# EAGLE board fixie18 (EAGLE 7.2.0)
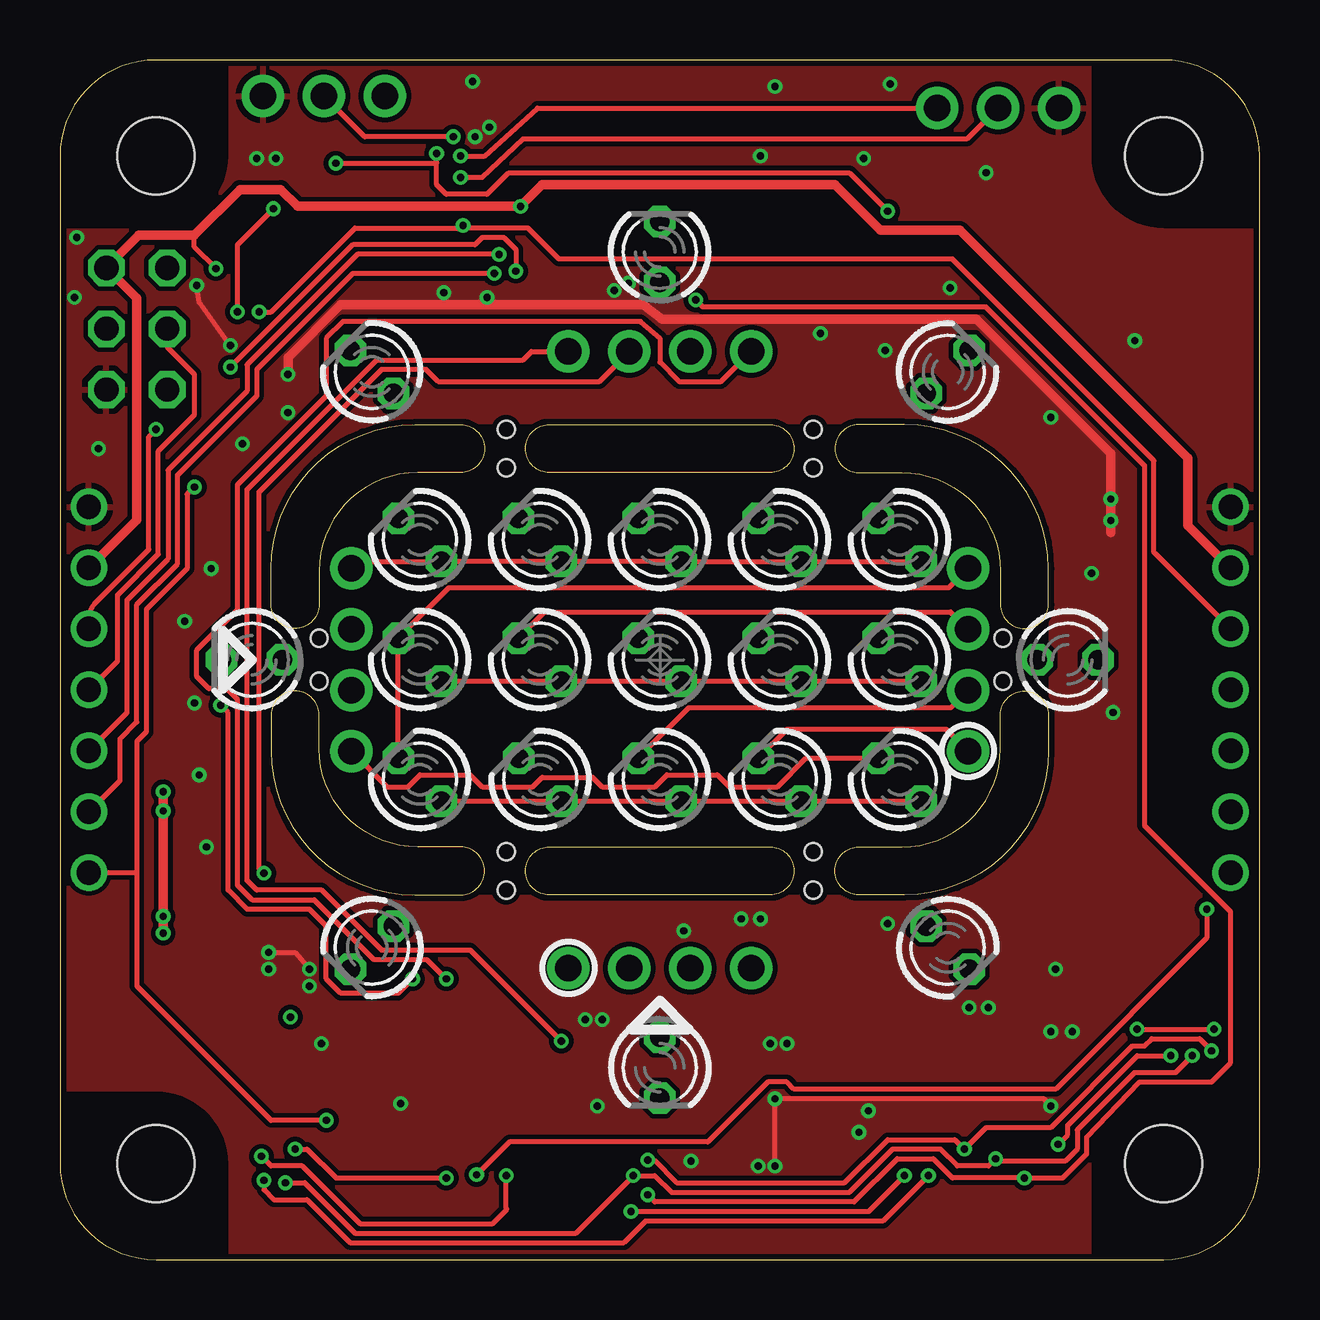
[diagram p0: board, top side]
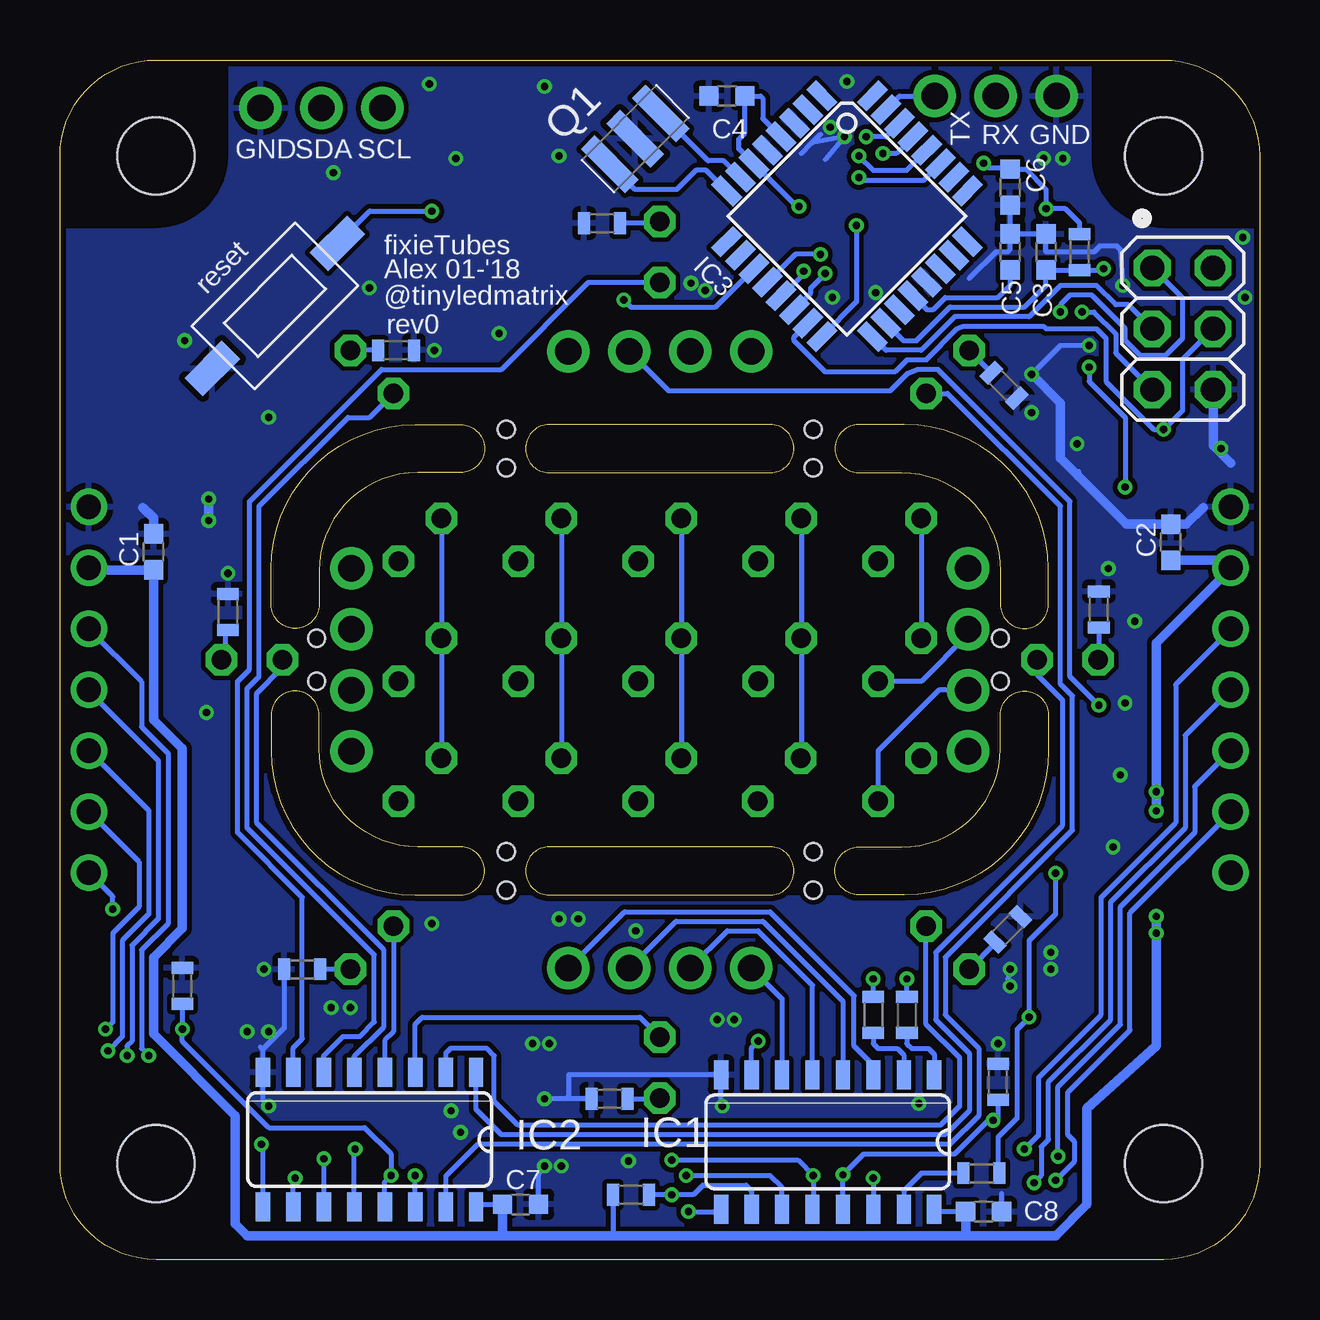
[diagram p1: board, bottom side, seen from below]

Size 50 x 50 mm. Coordinates in mm from the lower left corner, seen from the top.
Outline: 17.7,33.8 arc-90 16.7,32.8 14.9,32.8 arc90 10.8,28.7 10.8,27.3 arc-90 9.8,26.3 arc-90 8.8,27.3 8.8,28.8 arc-90 14.8,34.8 16.7,34.8 arc-90 17.7,33.8
Outline: 17.7,16.2 arc90 16.7,17.2 14.9,17.2 arc-90 10.8,21.3 10.8,22.7 arc90 9.8,23.7 arc90 8.8,22.7 8.8,21.2 arc90 14.8,15.2 16.7,15.2 arc90 17.7,16.2
Outline: 32.3,33.8 arc90 33.3,32.8 35.1,32.8 arc-90 39.2,28.7 39.2,27.3 arc90 40.2,26.3 arc90 41.2,27.3 41.2,28.8 arc90 35.2,34.8 33.3,34.8 arc90 32.3,33.8
Outline: 32.3,16.2 arc-90 33.3,17.2 35.1,17.2 arc90 39.2,21.3 39.2,22.7 arc-90 40.2,23.7 arc-90 41.2,22.7 41.2,21.2 arc-90 35.2,15.2 33.3,15.2 arc-90 32.3,16.2
Outline: 19.4,16.2 arc-90 20.4,17.2 29.6,17.2 arc-90 30.6,16.2 arc-90 29.6,15.2 20.4,15.2 arc-90 19.4,16.2
Outline: 20.4,34.8 29.6,34.8 arc-90 30.6,33.8 arc-90 29.6,32.8 20.4,32.8 arc-90 19.4,33.8 arc-90 20.4,34.8
Copper layers (1*16): Top 0.035mm / dielectric 1.5mm / Bottom 0.035mm
Design rules "dirt_cheap_dirty_boards.v1 *": minimum track width 5mil, minimum drill 12mil, track to track 0.2mm, track to pad 0.2mm, pad to pad 0.2mm, via to via 0.2mm, smd to smd 0.2mm, copper to edge 10mil, drill to drill 10mil, minimum pad ring 10mil, minimum via ring 6mil, stop-mask expansion 2mil, vias tented up to drill 25mil, thermal gap 10mil
Holes 0.7 mm at 18.6,15.4 18.6,17 31.4,15.4 31.4,17 31.4,33 31.4,34.6 18.6,33 18.6,34.6 10.8,25.9 10.8,24.1 39.3,24.1 39.3,25.9
tRestrict: 5 lines
bRestrict: 7 lines

## Footprints (pad centres in the part's own frame; a part is rotated, then mirrored left to right if it is on the bottom)
C0603-VISHAY = smd 0.8 x 0.8: 1 -0.75,0; 2 0.75,0
SO16 = smd 0.6 x 1.2: 1 -4.445,-2.8; 2 -3.175,-2.8; 3 -1.905,-2.8; 4 -0.635,-2.8; 5 0.635,-2.8; 6 1.905,-2.8; 7 3.175,-2.8; 8 4.445,-2.8; 9 4.445,2.8; 10 3.175,2.8; 11 1.905,2.8; 12 0.635,2.8; 13 -0.635,2.8; 14 -1.905,2.8; 15 -3.175,2.8; 16 -4.445,2.8
TQFP32-08 = smd 1.27 x 0.559: 1 -4.293,2.8; 2 -4.293,2; 3 -4.293,1.2; 4 -4.293,0.4; 5 -4.293,-0.4; 6 -4.293,-1.2; 7 -4.293,-2; 8 -4.293,-2.8; 17 4.293,-2.8; 18 4.293,-2; 19 4.293,-1.2; 20 4.293,-0.4; 21 4.293,0.4; 22 4.293,1.2; 23 4.293,2; 24 4.293,2.8 | smd 0.559 x 1.27: 9 -2.8,-4.293; 10 -2,-4.293; 11 -1.2,-4.293; 12 -0.4,-4.293; 13 0.4,-4.293; 14 1.2,-4.293; 15 2,-4.293; 16 2.8,-4.293; 25 2.8,4.293; 26 2,4.293; 27 1.2,4.293; 28 0.4,4.293; 29 -0.4,4.293; 30 -1.2,4.293; 31 -2,4.293; 32 -2.8,4.293
1X07_RNDNOSILK = drill 1.016: 1 -7.62,0; 2 -5.08,0; 3 -2.54,0; 4 0,0; 5 2.54,0; 6 5.08,0; 7 7.62,0
1X04_ROUND_NOSM = drill 1.1 pad 1.778: 1 -3.81,0; 2 -1.27,0; 3 1.27,0; 4 3.81,0
2X03 = drill 1.016 octagon: 1 -2.54,-1.27; 2 -2.54,1.27; 3 0,-1.27; 4 0,1.27; 5 2.54,-1.27; 6 2.54,1.27
1X03_ROUND_NOSM = drill 1.1 pad 1.778: 1 -2.54,0; 2 0,0; 3 2.54,0
LED3MM = drill 0.813 octagon: A -1.27,0; K 1.27,0
CSTCR6M = smd 0.8 x 2.6: 1 -1.5,0; 2 0,0; 3 1.5,0
ADAFRUIT_R0603-VISHAY = smd 0.5 x 0.9: 1 -0.75,0; 2 0.75,0
SMDSWITCH = smd 2.184 x 1.067: P$1 -3.685,0; P$2 3.685,0
DP5050_V1 = hole 3.2: 4,4; 46,4; 46,46; 4,46

## Placement (x,y rotation side)
C1  1u  [C0603-VISHAY]  46.1,29.5 90 bottom
C2  1u  [C0603-VISHAY]  3.7,29.9 90 bottom
C3  0.1  [C0603-VISHAY]  8.9,42 270 bottom
C4  0.1  [C0603-VISHAY]  22.2,48.5 0 bottom
C5  0.1  [C0603-VISHAY]  10.4,42 270 bottom
C6  0.1  [C0603-VISHAY]  10.4,44.7 90 bottom
C7  100n  [C0603-VISHAY]  30.8,2.3 0 bottom
C8  100n  [C0603-VISHAY]  11.5,2 0 bottom
IC1  74LS595D  [SO16]  18,4.9 180 bottom
IC2  74LS595D  [SO16]  37.1,5 180 bottom
IC3  MEGA8-AI  [TQFP32-08]  17.19,43.49 315 bottom
JP1  [1X07_RNDNOSILK]  48.8,23.75 90 top
JP2  [1X07_RNDNOSILK]  1.2,23.75 90 top
JP3  [1X04_ROUND_NOSM]  25,12.15 0 top
JP4  [1X04_ROUND_NOSM]  25,37.85 180 top
JP5  [2X03]  3.2,38.8 270 bottom
JP6  [1X03_ROUND_NOSM]  39.1,48 180 top
JP7  [1X03_ROUND_NOSM]  11,48.5 0 top
JP8  [1X04_ROUND_NOSM]  37.85,25 90 top
JP9  [1X04_ROUND_NOSM]  12.15,25 270 top
LED1  [LED3MM]  25,42 90 top
LED2  [LED3MM]  37,37 45 top
LED3  [LED3MM]  42,25 0 top
LED4  [LED3MM]  37,13 315 top
LED5  [LED3MM]  25,8 270 top
LED6  [LED3MM]  13,13 225 top
LED7  [LED3MM]  8,25 180 top
LED8  [LED3MM]  13,37 135 top
LED9  [LED3MM]  15,20 135 top
LED10  [LED3MM]  20.02,20 135 top
LED11  [LED3MM]  25,20 135 top
LED12  [LED3MM]  30,20 135 top
LED13  [LED3MM]  35,20 135 top
LED14  [LED3MM]  15,25 135 top
LED15  [LED3MM]  20,25 135 top
LED16  [LED3MM]  25,25 135 top
LED17  [LED3MM]  30,25 135 top
LED18  [LED3MM]  35,25 135 top
LED19  [LED3MM]  15,30 135 top
LED20  [LED3MM]  20,30 135 top
LED21  [LED3MM]  25,30 135 top
LED22  [LED3MM]  30,30 135 top
LED23  [LED3MM]  35,30 135 top
Q1  CSTCR6M00G53Z  [CSTCR6M]  26.02,46.72 225 bottom
R1  1k  [ADAFRUIT_R0603-VISHAY]  44.9,11.4 270 bottom
R2  1k  [ADAFRUIT_R0603-VISHAY]  10.9,7.4 270 bottom
R3  1k  [ADAFRUIT_R0603-VISHAY]  26.2,2.7 180 bottom
R4  10k  [ADAFRUIT_R0603-VISHAY]  7.5,42 270 bottom
R5  [ADAFRUIT_R0603-VISHAY]  27.4,43.2 0 bottom
R6  [ADAFRUIT_R0603-VISHAY]  11.6,3.6 0 bottom
R7  [ADAFRUIT_R0603-VISHAY]  14.7,10.2 90 bottom
R8  [ADAFRUIT_R0603-VISHAY]  36,37.9 180 bottom
R9  [ADAFRUIT_R0603-VISHAY]  16.1,10.2 90 bottom
R10  [ADAFRUIT_R0603-VISHAY]  43,27 270 bottom
R11  [ADAFRUIT_R0603-VISHAY]  39.9,12.1 0 bottom
R12  [ADAFRUIT_R0603-VISHAY]  27.1,6.7 0 bottom
R13  [ADAFRUIT_R0603-VISHAY]  10.49,13.76 225 bottom
R14  [ADAFRUIT_R0603-VISHAY]  6.7,27.1 270 bottom
R15  [ADAFRUIT_R0603-VISHAY]  10.64,36.44 135 bottom
S1  [SMDSWITCH]  41.04,39.75 45 bottom
U$1  [DP5050_V1]  0,0 0 top

## Library data of the parts
C1-C8 R1-R15 = rcl
IC1 IC2 = SparkFun-DigitalIC; PROD_ID: IC-07875
IC3 = atmel; MPN: ATMEGA8-16AU; OC_FARNELL: 9171371; OC_NEWARK: 73M8863
JP1-JP9 = pinhead
LED1-LED23 = led
Q1 = murata-filter; MPN: CSTCR6M00G53-R0; OC_FARNELL: 1170434; OC_NEWARK: 25M8759
S1 = _miniRoboter
U$1 = dp_pcb

## Nets
1: JP4.3 R6.2
2: JP4.2 R7.2
3: JP4.1 R9.2
!CLR: IC1.10 IC2.10 IC3.11 R3.1
+5V: C1.1 C2.1 C3.2 C4.2 C7.1 C8.1 IC1.16 IC2.16 IC3.4 IC3.6 IC3.18 JP1.6 JP2.6 JP5.2 R3.2 R4.2
A: IC1.3 JP3.4
B: IC1.4 JP3.3
C: IC1.5 JP3.2
CLK: IC1.11 IC2.11 IC3.17 JP1.4 JP2.4 JP5.3
COL_1: JP9.3 LED9.A LED10.A LED11.A LED12.A LED13.A
COL_2: JP9.2 LED14.A LED15.A LED16.A LED17.A LED18.A
COL_3: JP9.1 LED19.A LED20.A LED21.A LED22.A LED23.A
D: IC1.6 JP3.1
E: IC1.7 JP4.4
GND: C1.2 C2.2 C3.1 C4.1 C5.1 C6.1 C7.2 C8.2 IC1.8 IC2.8 IC3.3 IC3.5 IC3.21 JP1.7 JP2.7 JP5.6 JP6.1 JP7.1 Q1.2 R1.1 R2.1 R5.1 R8.1 R10.1 R11.1 R12.1 R13.1 R14.1 R15.1 S1.P$1
LATCH: IC1.12 IC2.12 IC3.12 JP1.3 JP2.3
MATRIX_EN: IC1.13 IC3.13 JP1.1 JP2.1 R2.2
MCU_RST: C6.2 IC3.29 JP5.5 R4.1 S1.P$2
N$2: IC2.7 LED1.A
N$3: IC2.6 LED2.A
N$4: IC2.5 LED3.A
N$5: IC2.4 LED4.A
N$6: IC2.3 LED5.A
N$7: IC2.2 LED6.A
N$8: IC2.1 LED7.A
N$9: IC2.15 LED8.A
N$10: IC1.15 R6.1
N$11: IC1.1 R7.1
N$12: IC1.2 R9.1
N$13: LED1.K R5.2
N$14: LED2.K R8.2
N$15: LED3.K R10.2
N$16: LED4.K R11.2
N$17: LED5.K R12.2
N$18: LED6.K R13.2
N$19: LED7.K R14.2
N$20: LED8.K R15.2
N$21: IC1.9 IC2.14
N$24: IC3.32
N$25: IC3.1
N$26: IC3.2
N$27: IC3.9
N$28: IC3.10
N$30: IC3.23
N$31: IC3.24
N$32: IC3.25
N$33: IC3.26
N$36: C5.2 IC3.20
N$38: IC3.19
N$39: IC3.22
PB6: IC3.7 Q1.1
PB7: IC3.8 Q1.3
RING_EN: IC2.13 IC3.14 JP1.2 JP2.2 R1.2
ROW_A: JP8.4 LED9.K LED14.K LED19.K
ROW_B: JP8.3 LED10.K LED15.K LED20.K
ROW_C: JP8.2 LED11.K LED16.K LED21.K
ROW_D: JP8.1 LED12.K LED17.K LED22.K
ROW_E: JP9.4 LED13.K LED18.K LED23.K
RX: IC3.30 JP7.2
SCL: IC3.28 JP6.3
SDA: IC3.27 JP6.2
SI: IC1.14 IC3.15 JP2.5 JP5.4
SO: IC2.9 IC3.16 JP1.5 JP5.1
TX: IC3.31 JP7.3

## Tracks (layer width: path | path; a pad name or v marks a point on that pad's centre or on a via)
1  (via drill 0.3)
  Top 0.2: v8.5,16.1 8.3,16.3 8.3,32 13.4,37.1 15.26,37.1 15.76,36.6 22.48,36.6 JP4.3
  Bottom 0.2: v8.5,16.1 8.5,14.4 9.6,13.3 v9.6,10.1 10.1,9.6 10.1,5.9 10.9,5.1 10.9,3.65 R6.2
2  (via drill 0.3)
  Top 0.2: v14.7,11.7 14.1,11.1 11.7,11.1 11.1,11.7 11.1,13.9 10.4,14.6 7.8,14.6 7,15.4 7,22.8 v6.7,23.1
  Bottom 0.2: R7.2 v14.7,11.7 | v6.7,23.1 7.9,24.3 7.9,31.6 13.4,37.1 14.25,37.1 14.7,36.9 15.4,36.2 24.62,36.2 JP4.2
3  (via drill 0.3)
  Top 0.2: JP4.1 27.56,36.6 25.8,36.6 25,37.4 25,38.4 24.2,39.1 11.8,39.1 11.1,38.4 11.1,36 7.4,32.3 7.4,27.1 5.7,25.4 5.7,24.3 6.2,23.8 6.95,23.8 7.4,23.35 7.4,15.6 8,15 10.6,15 13.1,12.5 15.3,12.5 v16.1,11.7
  Bottom 0.2: R9.2 v16.1,11.7
!CLR  (via drill 0.3)
  Top 0.2: v24.5,2.7 24.8,2.4 33.1,2.4 34.9,4.2 36.4,4.2 37.2,3.4 v40.2,3.4 41.8,3.4 42.8,4.4 42.8,5.1 45,7.4 48,7.4 48.8,8.2 48.8,14.5 45.2,18.1 45.2,33.1 38.6,39.7 26.8,39.7 v26.5,40
  Bottom 0.2: IC2.10 40.27,3.43 v40.2,3.4 | IC1.10 21.18,2.88 21.4,3.1 23.2,3.1 23.6,2.7 v24.5,2.7 R3.1 | v26.5,40 26.2,39.7 22.68,39.7 IC3.11
+5V  (via drill 0.3)
  Top 0.2: v6.5,41.3 5.6,42.2 5.6,42.7 | 4.7,42.7 5.1,42.7
  Top 0.4: v4.3,13.6 v4.3,14.3 v4.3,18.7 v4.3,19.5 | JP2.6 3.19,30.82 3.2,30.82 3.2,40.07 JP5.2 3.29,42.7 4.7,42.7 5.6,42.7 7.5,44.6 9.2,44.6 9.9,43.9 v19.2,43.9 20.1,44.8 32.3,44.8 34.2,42.9 37.5,42.9 47,33.4 47,30.6 48.8,28.8 JP1.6
  Bottom 0.2: C8.1 13.55,2 IC1.16 | IC2.16 32.55,2.3 C7.1 | R3.2 26.95,1.1 27,1 | v6.5,41.3 6.55,41.25 R4.2 C3.2 8.9,40.6 9.8,39.7 12.9,39.7 14.3,38.3 14.84,38.3 IC3.18 | IC3.4 20.7,47.56 20.7,48.4 20.8,48.5 C4.2 21.45,46.95 21.7,46.7 21.7,46.3 IC3.6 19.3,43.9 v19.2,43.9
  Bottom 0.4: 31.55,1 42.2,1 42.7,1.5 42.7,6 46.1,9.4 46.1,12.6 44.9,13.8 44.9,21.3 46.1,22.5 C1.1 48.74,28.75 48.74,28.77 JP1.6 | 31.55,1 27,1 12.25,1 | 12.25,1 C8.1 | C7.1 31.55,1 | 12.25,1 8.5,1 7.2,2.3 7.2,6.3 4.3,8.9 v4.3,14.3 | C2.1 1.52,29.15 JP2.6 | v4.3,18.7 v4.3,19.5 4.3,25.7 1.2,28.8
A
  Bottom 0.2: JP3.4 26.46,14.5 20.4,14.5 16.9,11 16.9,8.9 16.09,8.09 IC1.3
B
  Bottom 0.2: JP3.3 24.32,14.1 20.7,14.1 17.37,10.77 IC1.4
C
  Bottom 0.2: JP3.2 22.18,13.7 20.9,13.7 18.63,11.44 IC1.5
CLK  (via drill 0.3)
  Top 0.2: JP5.3 4.47,38.03 5.6,36.9 5.6,35.2 4.1,33.7 4.1,29.4 2.4,27.7 2.4,24.94 arc45 2.38,24.93 JP2.4 | v47.2,8.5 46.5,7.8 44.8,7.8 42.4,5.4 42.4,4.6 41.9,4.1 39.1,4.1 v39,4.2 38.7,3.9 37.4,3.9 36.7,4.6 34.7,4.6 32.9,2.8 25.5,2.8 24.8,3.5 v23.9,3.5 21.5,1.1 12.3,1.1 10.2,3.2 v9.4,3.2
  Bottom 0.2: IC1.11 19.91,3 20.4,3.5 v23.9,3.5 | v39,4.2 v39.01,4.2 IC2.11 | JP5.3 5.47,39.8 6,39.8 6.8,40.6 8.3,40.6 9.6,39.3 12.7,39.3 14.1,37.9 15.57,37.9 IC3.17 | 48.8,23.7 45.9,20.8 45.9,14.2 47,13.1 47,9.1 47.2,8.9 v47.2,8.5 | JP2.4 3.1,21.85 3.1,18 6.2,14.9 6.2,10 8.8,7.4 8.8,5 9.1,4.7 9.1,3.5 v9.4,3.2
  Bottom 0.4: 48.8,23.7 JP1.4
COL_1
  Top 0.2: LED9.A LED10.A LED11.A LED12.A LED13.A
  Bottom 0.2: JP9.3 13.37,23.73 15.9,21.2 LED9.A
COL_2
  Top 0.2: LED18.A LED17.A LED16.A LED15.A LED14.A
  Bottom 0.2: JP9.2 12.15,26.05 14.1,24.1 LED14.A
COL_3
  Top 0.2: JP9.1 12.44,29.1 LED19.A LED20.A LED21.A LED22.A LED23.A
D
  Bottom 0.2: JP3.1 19.91,10.87 IC1.6
E  (via drill 0.3)
  Top 0.2: v20.9,9.1 17.1,12.9 13.4,12.9 10.9,15.4 8.2,15.4 7.8,15.8 7.8,32.1 13.2,37.5 19.3,37.5 19.65,37.85 JP4.4
  Bottom 0.2: IC1.7 21.18,8.82 v20.9,9.1
GND  (via drill 0.3)
  Top 0.2: v29.8,3.9 v29.8,6.7 41,6.7 v41.3,6.4 | v7.1,38.1 5.8,39.9 v5.7,40.6 | v8.7,12.8 9.8,12.8 v10.4,12.1
  Top 0.4: 43.8,30.3 v43.8,30.8 v43.8,31.7 43.8,33.6 38.2,39.2 25.1,39.2 24.3,39.8 11.7,39.8 9.5,37.6 v9.5,36.9
  Bottom 0.2: C7.2 30.05,3.55 v29.8,3.9 | v41.3,6.4 41.55,6.64 IC2.8 41.55,8.75 | v22.4,6.4 22.45,6.45 IC1.8 28.8,7.7 28.8,6.8 28.9,6.7 | R11.1 40.65,9.65 41.55,8.75 | 41.64,8.85 41.55,8.75 | C8.2 10.75,2.75 | C5.1 C3.1 8.9,42 6.9,42 6.66,42.24 5.94,42.24 5.8,42.1 v5.7,40.6 | C5.1 10.4,42.1 10.5,42 11,42 12.1,40.9 | 19.1,46.1 18.65,46.55 | 18.65,46.55 18.3,46.9 | 18.65,46.55 v17.3,46.8 18.1,45.86 | C6.1 C5.1 | 7.55,32.85 7.55,32.65 | v7.1,38.1 8.3,38.1 v9.5,36.9 | R12.1 28.9,6.7 | 28.9,6.7 v29.8,6.7 | v10.4,12.1 10.5,11.7 10.4,11.6
  Bottom 0.4: 46.55,31.35 46.1,30.9 C1.2 | 2.35,31.35 3.05,30.65 C2.2 5.55,30.65 7.55,32.65 8.3,33.4 8.3,35.7 v9.5,36.9 | JP5.6 1.93,33.93 1.19,33.19 | v43.8,31.7 v43.8,30.8
  other vias: 41.5,12.1 6.3,28.8 9.5,35.3 34.4,37.9 43,28.6 10.9,9 8.7,12.1 10.4,11.4 14.2,6.5 21.9,10 22.6,10 26,13.7 28.4,14.2 29.2,14.2 29.6,9 30.3,9 29.1,3.9 33.3,5.3 33.7,6.2 26.3,4.1 42.2,9.5 41.3,9.5 38.7,10.5 37.9,10.5 34.5,14 43.9,22.8 41.3,35.1 37.1,40.5 31.7,38.6 23.7,40.7 23.1,40.4 17.8,40.1 16,40.3 7.6,34 5.2,26.6 5.6,23.2 5.8,20.2 6.1,17.2 1.6,33.8 9,45.9 17.9,47.2 29.2,46 33.5,45.9 29.8,48.9 34.6,49 17.2,49.1 38.6,45.3 44.8,38.3 8.2,45.9 0.7,42.6 0.6,40.1
  pour Bottom: -1.8,52.4 53.3,52.4 53.3,-4.6 -1.8,-4.6
  pour Top: -2.9,52.7 -2.9,-5.9 arc90 -1.9,-6.9 54.7,-6.9 54.7,51.7 arc90 53.7,52.7
LATCH  (via drill 0.3)
  Top 0.2: v24.5,4.15 24.75,4.15 25.7,3.2 32.7,3.2 34.5,5 37.3,5 v37.7,4.6 38.6,5.5 41.3,5.5 44.7,8.9 45.2,8.9 45.5,9.2 47.5,9.2 v48,8.7 | v18.6,3.5 18.6,2.14 IC1.12 18.04,1.5 12.5,1.5 10.1,3.9 8.8,3.9 v8.4,4.3 | v18.3,41.9 12.4,41.9 7.8,37.3 7.8,36.2 4.5,32.9 4.5,29.2 2.8,27.5 2.8,22.8 1.22,21.22 arc-45 JP2.3
  Bottom 0.2: IC2.12 37.73,4.57 v37.7,4.6 | IC1.12 18.6,2.14 v18.6,3.5 19.25,4.15 v24.5,4.15 | v48,8.7 47.4,9.3 47.4,13.3 46.3,14.4 46.3,18.71 JP1.3 | v18.3,41.9 19.34,41.9 IC3.12 | JP2.3 2.7,19.71 2.7,17.8 5.8,14.7 5.8,9.8 8.4,7.2 v8.4,4.3
MATRIX_EN  (via drill 0.3)
  Top 0.2: v5.6,32.2 5.3,31.9 5.3,28.8 3.6,27.1 3.6,22 3.2,21.6 3.2,16.13 | 3.2,16.13 3.2,11.4 8.8,5.8 v11.1,5.8 | v7.1,37.2 12.2,42.3 17.3,42.3 17.6,42.6 18.5,42.6 19,42.1 v19,41.2 | JP2.1 3.2,16.13 | v47.8,14.6 47.8,13.4 41.5,7.1 30.6,7.1 30.3,7.4 29.5,7.4 27,4.9 18.73,4.9 v17.37,3.54
  Bottom 0.2: IC1.13 v17.37,3.54 16.5,4.4 12.7,4.4 11.3,5.8 v11.1,5.8 10.9,5.9 R2.2 | v7.1,37.2 7.1,36.6 5.6,35.1 v5.6,32.2 | v47.8,14.6 47.8,15.13 JP1.1 | v19,41.2 19,41.1 19.93,40.17 IC3.13
MCU_RST  (via drill 0.3)
  Top 0.2: v7.4,39.5 7.4,42.3 v8.9,43.8 | 15.7,45.7 15.7,44.8 16.1,44.4 17.8,44.4 18.7,45.3 32.9,45.3 v34.5,43.7 | 15.7,45.7 v15.7,46.1 | v11.5,45.7 15.7,45.7
  Bottom 0.2: S1.P$2 37.09,43.7 v34.5,43.7 | R4.1 7.5,43.2 8.1,43.8 v8.9,43.8 8.9,44.6 9.75,45.45 C6.2 10.45,45.5 11.3,45.5 v11.5,45.7 | 4.47,36.57 JP5.5 6,37.79 6,38.6 6.9,39.5 v7.4,39.5 | IC3.29 15.14,46.1 v15.7,46.1
N$2
  Bottom 0.2: LED1.A 27.97,40.73 31.6,37.1 36.6,37.1 42.1,31.6 42.1,24.6 42.6,24.1 42.6,17.8 39.9,15.1 39.9,9.2 40.27,8.82 IC2.7
N$3
  Bottom 0.2: IC2.6 39.01,8.5 38.2,9.3 37.5,9.3 36.9,9.9 36.9,12.7 42.2,18 42.2,23.8 41.7,24.3 41.7,31.4 38,35.1 37.1,35.1 LED2.A
N$4
  Bottom 0.2: IC2.5 37.73,8.46 36.5,9.7 36.5,12.9 41.8,18.2 41.8,23.6 40.73,24.67 LED3.A
N$5
  Bottom 0.2: LED4.A 36.1,9.5 36.47,9.13 IC2.4
N$6
  Bottom 0.2: IC2.3 35.2,9.8 34.9,10.1 25.83,10.1 LED5.A
N$7
  Bottom 0.2: IC2.2 33.92,8.6 33.73,8.8 32.2,8.8 31.9,8.5 31.9,6.6 30.9,5.6 13.3,5.6 12.5,6.4 12.5,8.4 13.9,9.8 LED6.A
N$8
  Bottom 0.2: IC2.1 32.66,6.25 31.6,5.2 13.1,5.2 12.1,6.2 12.1,8.6 13.5,10 13.5,12.8 8.2,18.1 8.2,23.3 9.27,24.37 LED7.A
N$9
  Bottom 0.2: LED8.A 13,36.1 8.3,31.4 8.3,24 7.8,23.5 7.8,17.9 13.1,12.6 13.1,10.2 11.7,8.8 11.7,6 12.9,4.8 32.6,4.8 33.92,3.48 IC2.15
N$10
  Bottom 0.2: IC1.15 14.82,2.88 14.1,3.6 R6.1
N$11
  Bottom 0.2: R7.1 14.7,9 14.5,8.8 13.8,8.8 13.55,8.55 IC1.1
N$12
  Bottom 0.2: R9.1 16.1,9 15.9,8.8 15.1,8.8 14.82,8.52 IC1.2
N$13
  Bottom 0.2: LED1.K 25.07,43.2 R5.2
N$14
  Bottom 0.2: R8.2 LED2.K
N$15
  Bottom 0.2: LED3.K 43.27,25.33 43.1,25.5 43.1,26.15 R10.2
N$16
  Bottom 0.2: LED4.K R11.2
N$17
  Bottom 0.2: R12.2 25.03,6.7 LED5.K
N$18
  Bottom 0.2: R13.2 11.03,13.18 LED6.K
N$19
  Bottom 0.2: R14.2 6.7,25.03 LED7.K
N$20
  Bottom 0.2: LED8.K R15.2
N$21  (via drill 0.3)
  Top 0.2: v35.2,3.5 33.7,2 v23.8,2
  Bottom 0.2: IC2.14 v35.2,3.5 | 22.55,2.2 IC1.9 22.55,2 v23.8,2
N$36
  Bottom 0.2: C5.2 10.4,40.6 10.9,40.1 13.1,40.1 13.6,39.6 13.87,39.6 IC3.20
PB6
  Bottom 0.2: IC3.7 22.34,45.8 22.99,45.8 Q1.1
PB7
  Bottom 0.2: IC3.8 23.07,45.4 23.5,45.4 24.3,44.6 26.03,44.6 Q1.3
RING_EN  (via drill 0.3)
  Top 0.2: v44.9,9.6 v48.1,9.6 | v36.2,3.5 34.3,1.6 24.4,1.6 23.5,0.7 12.1,0.7 10.3,2.5 8.9,2.5 8.5,2.9 v8.5,3.3 | v18.1,41.1 12.2,41.1 8.2,37.1 8.2,36 4.9,32.7 4.9,29 3.2,27.3 3.2,22.4 2.5,21.7 2.5,19.96 1.22,18.68 arc-45 JP2.2
  Bottom 0.2: IC2.13 36.47,3.23 v36.2,3.5 36.2,4.4 37.3,5.5 41.3,5.5 44.9,9.1 v44.9,9.6 R1.2 | v48.1,9.6 47.8,9.9 47.8,13.6 46.7,14.7 46.7,16.57 JP1.2 | IC3.14 18.7,40.28 18.7,40.5 v18.1,41.1 | JP2.2 1.2,18.64 5.4,14.44 5.4,9.56 8,6.96 8,5.2 7.7,4.9 7.7,4.1 v8.5,3.3
ROW_A
  Top 0.2: LED9.K LED14.K 16.2,28 37.04,28 JP8.4
  Bottom 0.2: LED19.K LED14.K
ROW_B
  Top 0.2: LED15.K 20.2,27 37.12,27 JP8.3
  Bottom 0.2: LED10.K 19.1,20.92 LED15.K LED20.K
ROW_C
  Top 0.2: JP8.2 37.12,23 26.2,23 LED11.K
  Bottom 0.2: LED21.K LED16.K 24.1,25.4 LED11.K
ROW_D
  Top 0.2: JP8.1 36.94,22.1 30.3,22.1 LED12.K
  Bottom 0.2: LED22.K LED17.K 29.1,25.4 LED12.K
ROW_E
  Top 0.2: JP9.4 13.64,19.7 14.5,19.7 15,20.2 17.1,20.2 17.6,19.7 19.7,19.7 20.1,20.1 22.2,20.1 22.6,19.7 24.8,19.7 25.3,20.2 27.4,20.2 27.9,19.7 29.9,19.7 31.1,20.9 LED13.K
  Bottom 0.2: LED23.K LED18.K LED13.K
RX  (via drill 0.3)
  Top 0.2: v16.4,46.8 12.7,46.8 JP7.2
  Bottom 0.2: IC3.30 15.58,46.8 v16.4,46.8
SCL  (via drill 0.3)
  Top 0.2: JP6.3 19.9,48 17.7,46 v16.7,46
  Bottom 0.2: v16.7,46 16.1,45.4 14.71,45.4 IC3.28
SDA  (via drill 0.3)
  Top 0.2: v16.7,45.1 17.6,45.1 19.3,46.7 37.8,46.7 JP6.2
  Bottom 0.2: IC3.27 13.98,45 16.6,45 v16.7,45.1
SI  (via drill 0.3)
  Top 0.2: v16.1,3.4 11.5,3.4 10.3,4.6 v9.8,4.6 | v4,34.6 3.7,34.3 3.7,29.6 1.49,27.39 arc45 1.2,26.69 JP2.5
  Bottom 0.2: v16.1,3.4 16.09,3.3 IC1.14 | JP5.4 3.2,37.53 3.2,35.4 v4,34.6 4.4,34.6 6.4,36.6 6.4,38.4 6.8,38.8 8.9,38.8 9,38.9 12.35,38.9 12.61,38.79 13.9,37.5 14.7,37.5 15.2,37 18.1,37 19.4,38.3 19.4,38.45 IC3.15 | JP2.5 1.2,26.26 3.5,23.96 3.5,18.2 6.6,15.1 6.6,10.2 9.2,7.6 9.2,5.2 v9.8,4.6
SO  (via drill 0.3)
  Top 0.2: v41.6,4.8 42,5.2 42,5.6 44.9,8.5 v46.3,8.5 | v8.3,39.5 8.8,39.5 12.3,43 16.6,43 v16.8,43.1 17,43 19.5,43 20.8,41.7 37.2,41.7 45.6,33.3 45.6,29.47 arc-45 45.63,29.46 JP1.5
  Bottom 0.2: v41.6,4.8 41.55,4.75 IC2.9 | JP5.1 3.2,40.07 3.2,38.4 3.9,37.7 5,37.7 5.6,38.3 5.6,38.8 7,40.2 7.9,40.2 8.3,39.8 v8.3,39.5 | v16.8,43.1 16.8,39.92 IC3.16 | JP1.5 46.6,24.09 46.6,22.2 45.5,21.1 45.5,14 46.6,12.9 46.6,8.8 v46.3,8.5
TX
  Bottom 0.2: IC3.31 15.01,48.5 JP7.3

## Text on the board
bPlace: TX | GND | RX | SCL | SDA | GND | reset
bNames: fixieTubes | Alex 01-'18 | @tinyledmatrix | rev0